# Altium PCB Stamp-C3.pcbdoc
Units mil, origin at the board's own origin, x right, y up, seen from the top; angles counter-clockwise.
Board outline 1968.5 x 1968.5 mil, 2 copper layers (Top Layer, Bottom Layer), stack 62.206 mil thick; 1 components, 0 nets, 22 pads, 0 vias.
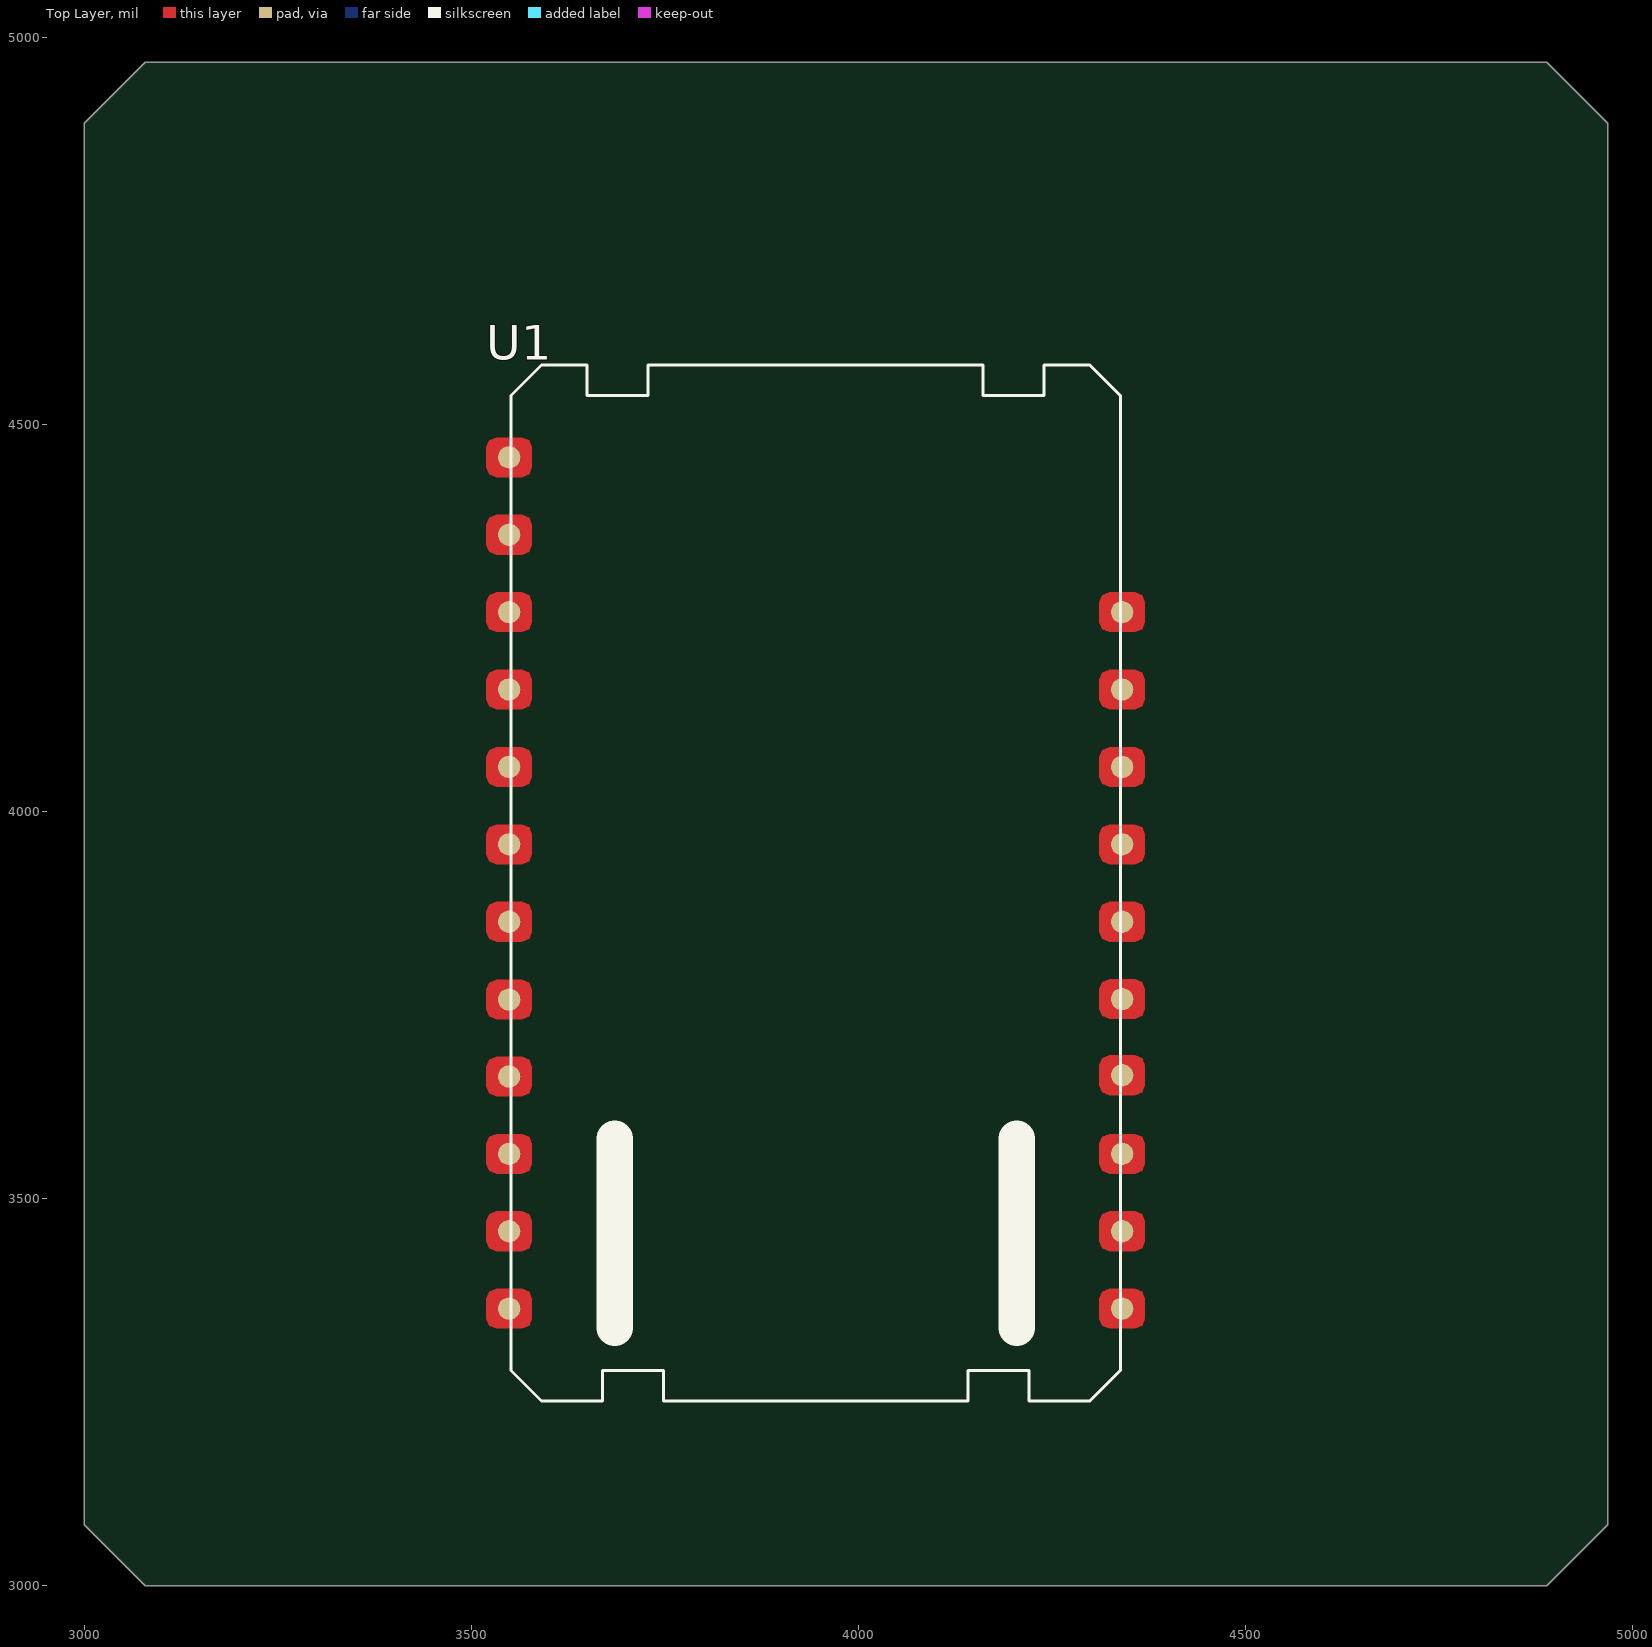
[diagram p0: Top Layer view]
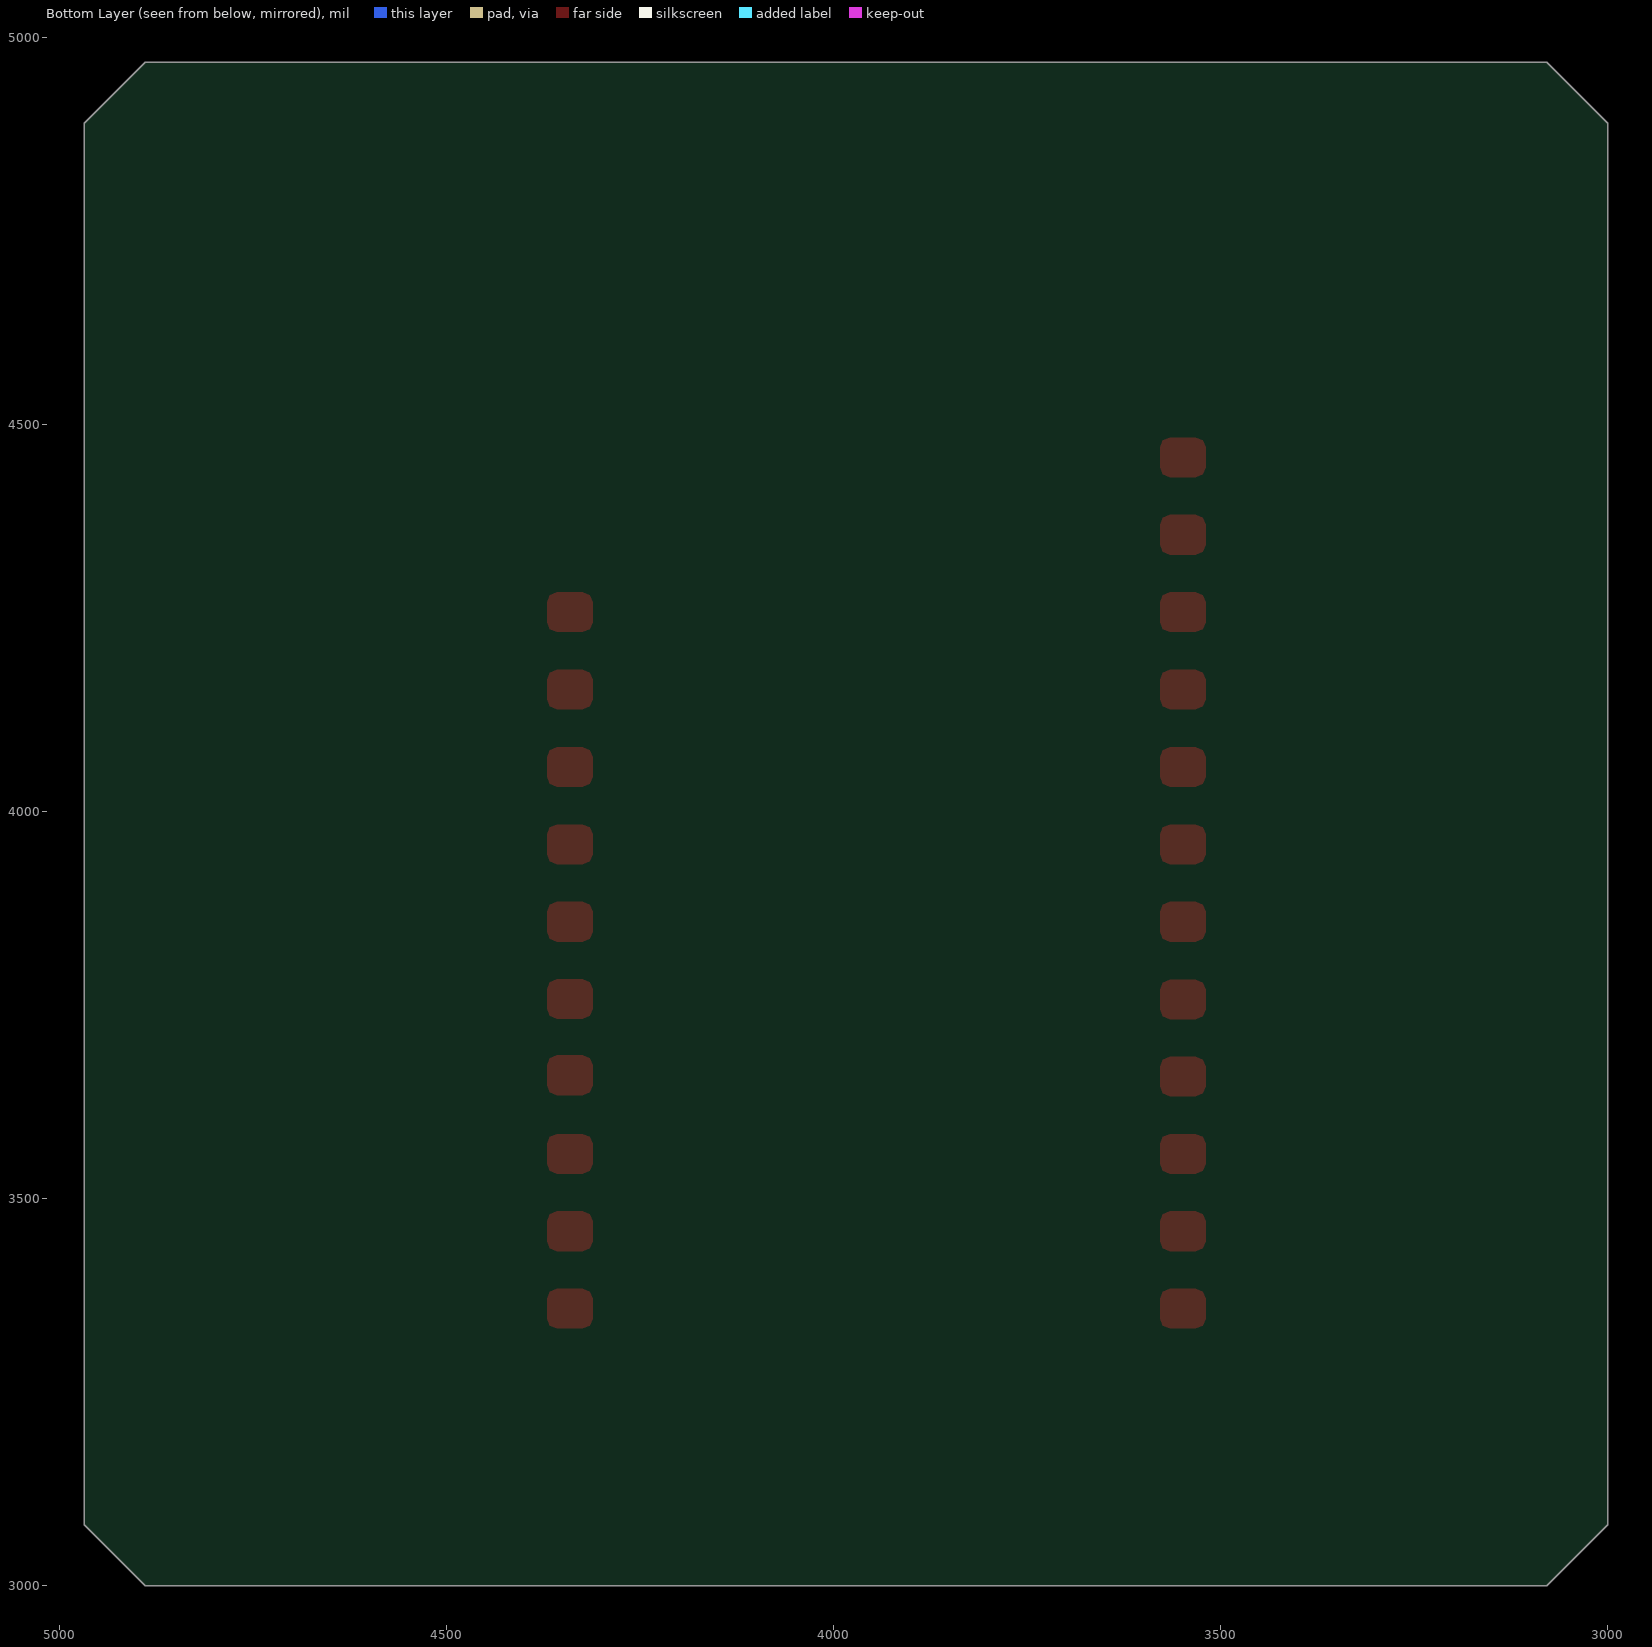
[diagram p1: Bottom Layer view, seen from below]

## Layer stack, top to bottom
Top Solder Mask Layer: solder mask 0.394, Dk 3.3
Top Layer: signal copper 1.379
Dielectric1: surface 59.449, FR4, Dk 4.5
Bottom Layer: signal copper 1.378
Bottom Solder Mask Layer: solder mask 0.394, Dk 3.3

## Board outline
3078.74,3000 3000,3078.74 3000,4889.76 3078.74,4968.5 4889.76,4968.5 4968.5,4889.76 4968.5,3078.74 4889.76,3000

## Design rules (kind name [scope] priority, off if disabled: settings)
BoardOutlineClearance copperThickness2oz_1 [All] p1: gap=10 ignorepadtopadclearanceinfootprint=FALSE except(0: Arc-SplitContinuation Track-SplitContinuation SMDPad-SplitContinuation THPad-SplitContinuation Via-SplitContinuation Fill-SplitContinuation Poly-SplitContinuation Region-SplitContinuation Text-SplitContinuation)
BoardOutlineClearance copperThickness1oz_1 [All] p2: gap=10 ignorepadtopadclearanceinfootprint=FALSE except(0: Arc-SplitContinuation Track-SplitContinuation SMDPad-SplitContinuation THPad-SplitContinuation Via-SplitContinuation Fill-SplitContinuation Poly-SplitContinuation Region-SplitContinuation Text-SplitContinuation)
BoardOutlineClearance Plane_innerPlane_1 [All] p3: gap=10 ignorepadtopadclearanceinfootprint=FALSE except(0: Arc-SplitContinuation Track-SplitContinuation SMDPad-SplitContinuation THPad-SplitContinuation Via-SplitContinuation Fill-SplitContinuation Poly-SplitContinuation Region-SplitContinuation Text-SplitContinuation)
BoardOutlineClearance otherClearance_1 [All] p4: gap=10 ignorepadtopadclearanceinfootprint=FALSE except(0: Arc-SplitContinuation Track-SplitContinuation SMDPad-SplitContinuation THPad-SplitContinuation Via-SplitContinuation Fill-SplitContinuation Poly-SplitContinuation Region-SplitContinuation Text-SplitContinuation)
BoardOutlineClearance Copper_copperRegion_1 [All] p5: gap=10 ignorepadtopadclearanceinfootprint=FALSE except(0: Arc-SplitContinuation Track-SplitContinuation SMDPad-SplitContinuation THPad-SplitContinuation Via-SplitContinuation Fill-SplitContinuation Poly-SplitContinuation Region-SplitContinuation Text-SplitContinuation)
Clearance copperThickness2oz [All] p1: gap=7 ignorepadtopadclearanceinfootprint=FALSE
Clearance copperThickness1oz [All] p2: gap=7 ignorepadtopadclearanceinfootprint=FALSE
Clearance Plane_innerPlane [All] p3: gap=7 ignorepadtopadclearanceinfootprint=FALSE
Clearance otherClearance [All] p4: gap=7 ignorepadtopadclearanceinfootprint=FALSE
Clearance Copper_copperRegion [All] p5: gap=7 ignorepadtopadclearanceinfootprint=FALSE
DiffPairsRouting differentialPair [All] p1: maxlimit=6 minlimit=6 mostfreqgap=6 toplayer_minwidth=5 toplayer_maxwidth=100 toplayer_prefwidth=10 bottomlayer_minwidth=5 bottomlayer_maxwidth=100 bottomlayer_prefwidth=10 maxuncoupledlength=10
PasteMaskExpansion pasteMaskExpansion [All] p1: expansion=0
PlaneConnect innerPlane [All] p1: planeconnectstyle=Relief reliefexpansion=20 reliefentries=4 reliefconductorwidth=10 reliefairgap=10
PolygonConnect copperRegion [All] p1: connectstyle=Relief reliefconductorwidth=10 reliefentries=4 polygonreliefangle="90 Angle" airgapwidth=10
RoutingVias viaSize [All] p1: holewidth=12.01 width=12.01 viastyle="Through Hole" minholewidth=11.81 minwidth=11.81 maxholewidth=248.03 maxwidth=248.03
SolderMaskExpansion solderMaskExpansion_1 [IsVia] p1: expansion=-1000 istentingtop=FALSE useseparateexpansions=TRUE expansionbottom=-1000 istentingbottom=FALSE
SolderMaskExpansion solderMaskExpansion [All] p2: expansion=2 istentingtop=FALSE useseparateexpansions=TRUE expansionbottom=2 istentingbottom=FALSE
Width copperThickness1oz_2 [All] p1: maxlimit=100 minlimit=5 preferedwidth=10
Width copperThickness2oz_2 [All] p2: maxlimit=100 minlimit=8 preferedwidth=10
27 further rules are at their usual default settings.

## Components (designator, comment, footprint, x,y, rotation, side; value= is the part's Value field where it differs from the comment)
U1 "M5STAMP-C3U_SMD_ONLY COPY" M5STAMP-C3U_SMD_ONLY 3930,3898 r0 top

## Footprints (in the part's own frame and the unit in brackets; to place one, negate y for a bottom-side part, rotate by r counter-clockwise, add the part's x,y. Pads: shape width x height; smd on the part's side, far side on the other; paste and mask are expansions set on the pad)
M5STAMP-C3U_SMD_ONLY [mil]
  round 28.82 smd: 1(-381.07,560) 2(-381.07,460) 3(-381.07,360) 4(-381.07,260) 5(-381.07,160) 6(-381.07,60) 7(-381.07,-40) 8(-381.07,-140.63) 9(-381.07,-240) 10(-381.07,-340) 11(-381.07,-440) 12(-381.07,-540) 13(411.06,-540) 14(411.06,-440) 15(411.06,-340) 16(411.06,-238.42) 17(411.06,-140) 18(411.06,-40) 19(411.06,60) 20(411.06,160) 21(411.06,260) 22(411.06,360)
  Top Layer region: -410.59,-527.2 -406.84,-518.16 -397.8,-514.41 -364.33,-514.41 -355.28,-518.16 -351.53,-527.2 -351.53,-552.8 -355.28,-561.84 -364.33,-565.59 -397.8,-565.59 -406.84,-561.84 -410.59,-552.8
  Top Layer region: -410.59,-427.2 -406.84,-418.16 -397.8,-414.41 -364.33,-414.41 -355.28,-418.16 -351.53,-427.2 -351.53,-452.8 -355.28,-461.84 -364.33,-465.59 -397.8,-465.59 -406.84,-461.84 -410.59,-452.8
  Top Layer region: -410.59,-327.2 -406.84,-318.16 -397.8,-314.41 -364.33,-314.41 -355.28,-318.16 -351.53,-327.2 -351.53,-352.8 -355.28,-361.84 -364.33,-365.59 -397.8,-365.59 -406.84,-361.84 -410.59,-352.8
  Top Layer region: -410.59,-227.2 -406.84,-218.16 -397.8,-214.41 -364.33,-214.41 -355.28,-218.16 -351.53,-227.2 -351.53,-252.8 -355.28,-261.84 -364.33,-265.59 -397.8,-265.59 -406.84,-261.84 -410.59,-252.8
  Top Layer region: -410.59,-127.83 -406.84,-118.79 -397.8,-115.04 -364.33,-115.04 -355.28,-118.79 -351.53,-127.83 -351.53,-153.43 -355.28,-162.47 -364.33,-166.22 -397.8,-166.22 -406.84,-162.47 -410.59,-153.43
  Top Layer region: -410.59,-27.2 -406.84,-18.16 -397.8,-14.41 -364.33,-14.41 -355.28,-18.16 -351.53,-27.2 -351.53,-52.8 -355.28,-61.84 -364.33,-65.59 -397.8,-65.59 -406.84,-61.84 -410.59,-52.8
  Top Layer region: -410.59,72.8 -406.84,81.84 -397.8,85.59 -364.33,85.59 -355.28,81.84 -351.53,72.8 -351.53,47.2 -355.28,38.16 -364.33,34.41 -397.8,34.41 -406.84,38.16 -410.59,47.2
  Top Layer region: -410.59,172.8 -406.84,181.84 -397.8,185.59 -364.33,185.59 -355.28,181.84 -351.53,172.8 -351.53,147.2 -355.28,138.16 -364.33,134.41 -397.8,134.41 -406.84,138.16 -410.59,147.2
  Top Layer region: -410.59,272.8 -406.84,281.84 -397.8,285.59 -364.33,285.59 -355.28,281.84 -351.53,272.8 -351.53,247.2 -355.28,238.16 -364.33,234.41 -397.8,234.41 -406.84,238.16 -410.59,247.2
  Top Layer region: -410.59,372.8 -406.84,381.84 -397.8,385.59 -364.33,385.59 -355.28,381.84 -351.53,372.8 -351.53,347.2 -355.28,338.16 -364.33,334.41 -397.8,334.41 -406.84,338.16 -410.59,347.2
  Top Layer region: -410.59,472.8 -406.84,481.84 -397.8,485.59 -364.33,485.59 -355.28,481.84 -351.53,472.8 -351.53,447.2 -355.28,438.16 -364.33,434.41 -397.8,434.41 -406.84,438.16 -410.59,447.2
  Top Layer region: -410.59,572.8 -406.84,581.84 -397.8,585.59 -364.33,585.59 -355.28,581.84 -351.53,572.8 -351.53,547.2 -355.28,538.16 -364.33,534.41 -397.8,534.41 -406.84,538.16 -410.59,547.2
  Top Layer region: 440.59,-552.8 436.84,-561.84 427.8,-565.59 394.33,-565.59 385.28,-561.84 381.54,-552.8 381.54,-527.2 385.28,-518.16 394.33,-514.41 427.8,-514.41 436.84,-518.16 440.59,-527.2
  Top Layer region: 440.59,-452.8 436.84,-461.84 427.8,-465.59 394.33,-465.59 385.28,-461.84 381.54,-452.8 381.54,-427.2 385.28,-418.16 394.33,-414.41 427.8,-414.41 436.84,-418.16 440.59,-427.2
  Top Layer region: 440.59,-352.8 436.84,-361.84 427.8,-365.59 394.33,-365.59 385.28,-361.84 381.54,-352.8 381.54,-327.2 385.28,-318.16 394.33,-314.41 427.8,-314.41 436.84,-318.16 440.59,-327.2
  Top Layer region: 440.59,-251.22 436.84,-260.27 427.8,-264.01 394.33,-264.01 385.28,-260.27 381.54,-251.22 381.54,-225.63 385.28,-216.58 394.33,-212.83 427.8,-212.83 436.84,-216.58 440.59,-225.63
  Top Layer region: 440.59,-152.8 436.84,-161.84 427.8,-165.59 394.33,-165.59 385.28,-161.84 381.54,-152.8 381.54,-127.2 385.28,-118.16 394.33,-114.41 427.8,-114.41 436.84,-118.16 440.59,-127.2
  Top Layer region: 440.59,-52.8 436.84,-61.84 427.8,-65.59 394.33,-65.59 385.28,-61.84 381.54,-52.8 381.54,-27.2 385.28,-18.16 394.33,-14.41 427.8,-14.41 436.84,-18.16 440.59,-27.2
  Top Layer region: 440.59,47.2 436.84,38.16 427.8,34.41 394.33,34.41 385.28,38.16 381.54,47.2 381.54,72.8 385.28,81.84 394.33,85.59 427.8,85.59 436.84,81.84 440.59,72.8
  Top Layer region: 440.59,247.2 436.84,238.16 427.8,234.41 394.33,234.41 385.28,238.16 381.54,247.2 381.54,272.8 385.28,281.84 394.33,285.59 427.8,285.59 436.84,281.84 440.59,272.8
  Top Layer region: 440.59,147.2 436.84,138.16 427.8,134.41 394.33,134.41 385.28,138.16 381.54,147.2 381.54,172.8 385.28,181.84 394.33,185.59 427.8,185.59 436.84,181.84 440.59,172.8
  Top Layer region: 440.59,347.2 436.84,338.16 427.8,334.41 394.33,334.41 385.28,338.16 381.54,347.2 381.54,372.8 385.28,381.84 394.33,385.59 427.8,385.59 436.84,381.84 440.59,372.8
  silkscreen extent -379,-659 409,679

## Nets (pads, with @x,y where several pads share a name; then routed paths per layer and width w, separated by ;. In a path a pad name is that pad's centre, name@x,y a point inside that pad or via, vN(x,y) a via of type N, cw(c..) or ccw(c..) an arc to the next point about the centre after c; other vN are vias at no path point)
pads on no net: U1.1 U1.2 U1.3 U1.4 U1.5 U1.6 U1.7 U1.8 U1.9 U1.10 U1.11 U1.12 U1.13 U1.14 U1.15 U1.16 U1.17 U1.18 U1.19 U1.20 U1.21 U1.22

## Silkscreen, mask and mechanical layers (free items; w line width, h text height)
Mechanical Layer:
  the board outline again, w10

## Text inside footprints (layer, text, board x,y; h text height)
U1: Document Layer "V1.0" at 3865,3798 h59.05; Document Layer "3" at 3703.75,4437 h39.37; Document Layer "C3U" at 3820,4108 h98.42; Document Layer "USB" at 3855,3258 h59.05